# Altium PCB Type-It.PcbDoc
Units mil, origin at the board's own origin, x right, y up, seen from the top; angles counter-clockwise.
Board outline 4720 x 4085 mil, 2 copper layers (Top Layer, Bottom Layer); 20 components, 25 nets, 92 pads, 4 vias.
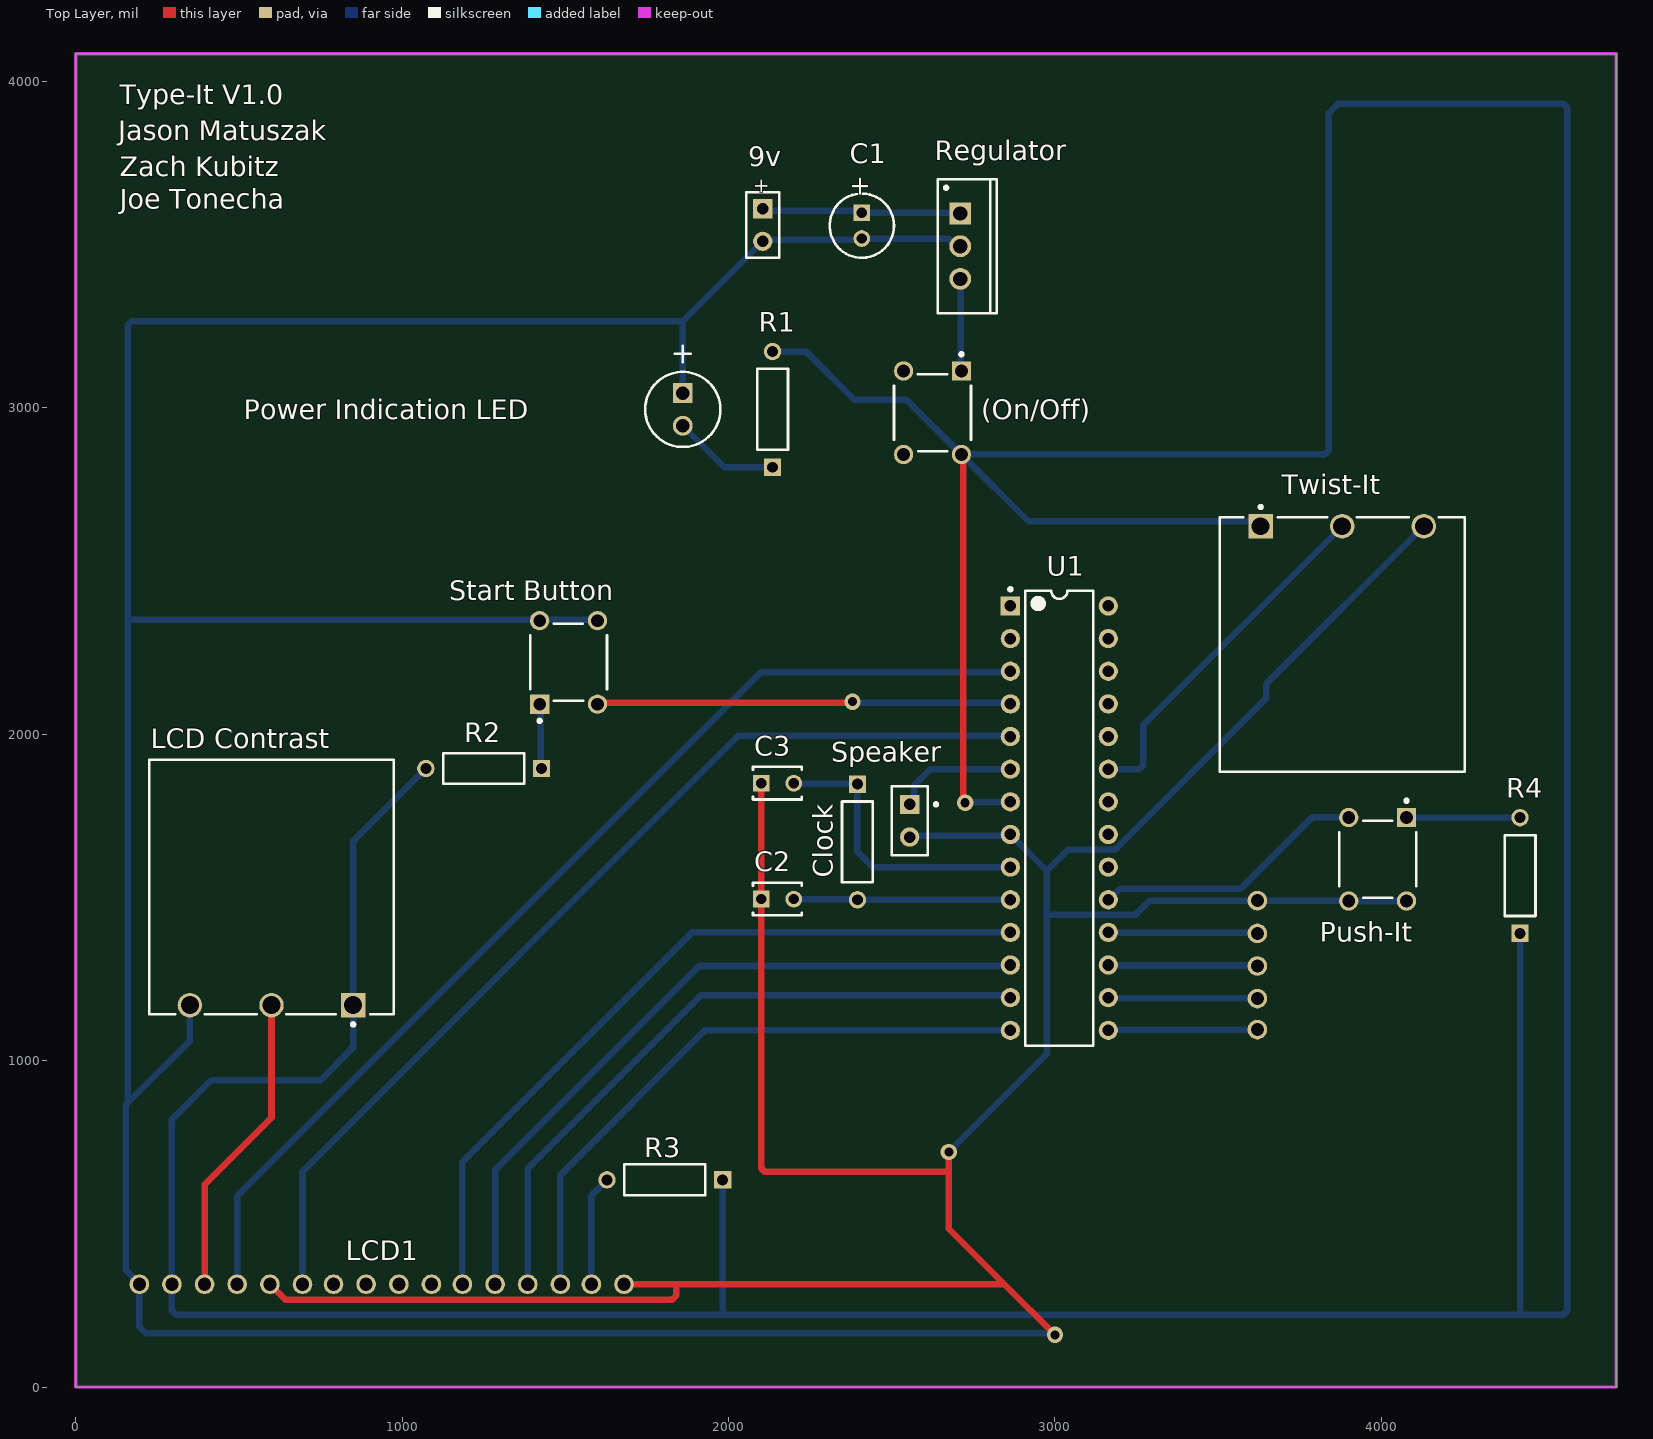
[diagram p0: Top Layer view]
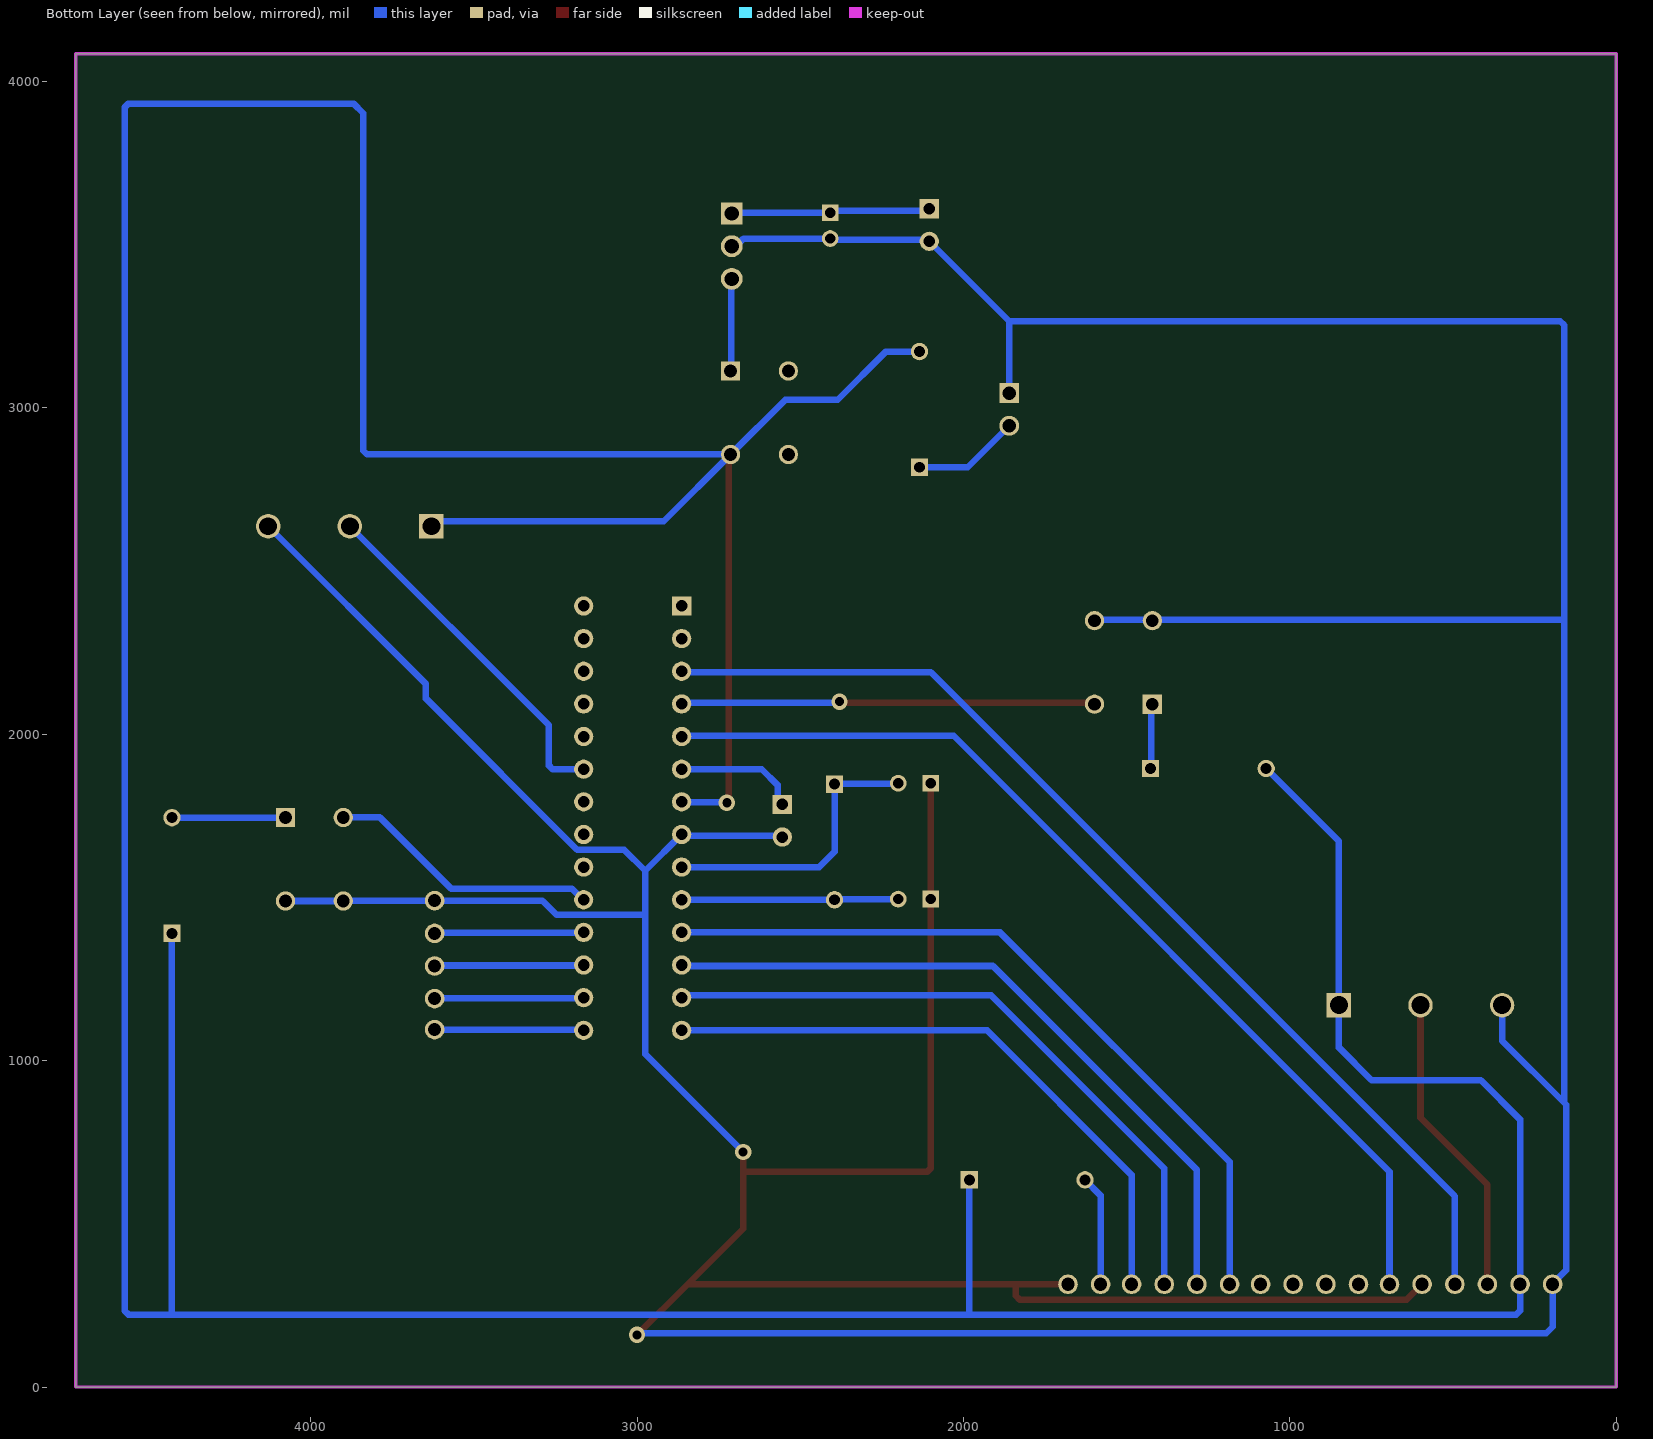
[diagram p1: Bottom Layer view, seen from below]

## Layer stack, top to bottom
Top Solder: solder mask 0.4, Solder Resist, Dk 3.5
Top Layer: signal copper 1.4
Dielectric 1: dielectric 12.6, FR-4, Dk 4.8
Bottom Layer: signal copper 1.4
Bottom Solder: solder mask 0.4, Solder Resist, Dk 3.5

## Board outline
0,0 4720,0 4720,4085 0,4085

## Design rules (kind name [scope] priority, off if disabled: settings)
BoardOutlineClearance [All] p1: gap=12 ignorepadtopadclearanceinfootprint=FALSE
Clearance [All] p1: gap=7 ignorepadtopadclearanceinfootprint=TRUE except(24: Arc-Via Track-Via SMDPad-Via THPad-Via Via-Via Via-Fill Via-Poly Via-Region Via-Text Via-Hole)
DiffPairsRouting [All] p1: maxlimit=10 minlimit=7 mostfreqgap=10 toplayer_minwidth=6 toplayer_maxwidth=15 toplayer_prefwidth=8 bottomlayer_minwidth=6 bottomlayer_maxwidth=15 bottomlayer_prefwidth=8 maxuncoupledlength=500
HoleToHoleClearance [All] p1: gap=17 allowstackedmicrovias=TRUE
PolygonConnect [All] p1: connectstyle=Relief reliefconductorwidth=10 reliefentries=4 polygonreliefangle="90 Angle" airgapwidth=10
RoomDefinition Type-It [InComponentClass('Type-It')] p1: confinementstyle=ConfineIn formatcopy=TRUE lockcomponents=FALSE outline 0,0 4720,0 4720,4085 0,4085
RoutingVias [All] p1: holewidth=30 width=35 viastyle="Through Hole" minholewidth=10 minwidth=11 maxholewidth=255 maxwidth=250
SilkToSilkClearance [All] p1: silktosilkclearance=0
SolderMaskExpansion SolderMaskExpansion_1 [All] p1: expansion=4 istentingtop=FALSE
Width [All] p1: maxlimit=10000 minlimit=7 preferedwidth=20 minimp=50.000000 maximp=50.000000 favimp=50.000000
27 further rules are at their usual default settings.

## Components (designator, comment, footprint, x,y, rotation, side; value= is the part's Value field where it differs from the comment)
9v "Battery" BAT-2 2105,3560 r270 top
(On/Off) "1825910-6" TECO-1825910-6_V 2625,2985 r270 top (schematic designator "DIP Switch (On/Off)")
C1 "10uF" CAPPR55-200-1100X500X1200 2408.58,3557.95 r270 top
C2 "22pF" KEMT-C315-THT-2 2150,1495 r0 top
C3 "22pF" KEMT-C315-THT-2 2150,1850 r0 top
Clock "" RESA60-630X240 2395,1670 r270 top
LCD1 "HD44780 1602 LCD Display Module" "test LCD footprint" 195,315 r0 top
"LCD Contrast" "Potentiometer" BOUR-3852A-282-103AL-3_V 600,1170 r180 top
"Power Indication LED" "HLMP-3301" AVAG-HLMP-3301-2 1860,3045 r270 top (schematic designator "Power Indicator LED")
Push-It "1825910-6" TECO-1825910-6_V 3988.58,1617.05 r270 top
R1 "220 Ohm" RESA60-630X240 2135,2995 r90 top
R2 "220 Ohm" RESA60-630X240 1250,1895 r180 top
R3 "220 Ohm" RESA60-630X240 1805,635 r180 top
R4 "220 Ohm" RESA60-630X240 4425,1567.17 r90 top
Regulator "L7805CV" TO220 2710,3495 r270 top (schematic designator Transformer)
Speaker "Speaker" PIN2 2555,1785 r270 top (schematic designator LoudSpeaker)
"Start Button" "1825910-6" TECO-1825910-6_V 1510,2220 r90 top
Twist-It "Potentiometer" BOUR-3852A-282-103AL-3_V 3880,2637.17 r0 top
U1 "ATmega328-PU" 28P3 3013.58,1742.95 r0 top
? "1x4 Keypad" "test keypad footprint" 3630,1490 r270 top

## Footprints (in the part's own frame and the unit in brackets; to place one, negate y for a bottom-side part, rotate by r counter-clockwise, add the part's x,y. Pads: shape width x height; smd on the part's side, far side on the other; paste and mask are expansions set on the pad)
28P3 [mm] "28-Pin Plastic Dual In-Line Package (PDIP)"
  rect 1.5x1.5 hole 0.9: 1(-3.81,16.51)
  round 1.5 hole 0.9: 2(-3.81,13.97) 3(-3.81,11.43) 4(-3.81,8.89) 5(-3.81,6.35) 6(-3.81,3.81) 7(-3.81,1.27) 8(-3.81,-1.27) 9(-3.81,-3.81) 10(-3.81,-6.35) 11(-3.81,-8.89) 12(-3.81,-11.43) 13(-3.81,-13.97) 14(-3.81,-16.51) 15(3.81,-16.51) 16(3.81,-13.97) 17(3.81,-11.43) 18(3.81,-8.89) 19(3.81,-6.35) 20(3.81,-3.81) 21(3.81,-1.27) 22(3.81,1.27) 23(3.81,3.81) 24(3.81,6.35) 25(3.81,8.89) 26(3.81,11.43) 27(3.81,13.97) 28(3.81,16.51)
  silkscreen extent -3.93,-17.7 2.65,17.93, body extent -3.6,-17.65 3.6,17.65, height 4.58
AVAG-HLMP-3301-2 [mm] "THD, 2-Leads, Body Dia 5.85mm"
  rect 1.55x1.55 hole 1.05: 1(0,0)
  round 1.55 hole 1.05: 2(2.54,0)
  silkscreen extent -3.68,-2.92 4.19,2.92
BAT-2 [mm] "Battery; 2 Leads"
  rect 1.5x1.5 hole 0.9: 1(-1.27,0)
  round 1.5 hole 0.9: 2(1.27,0)
  silkscreen extent -2.54,-1.27 2.54,1.27
BOUR-3852A-282-103AL-3_V [mm] "TH, 3-Leads, Body 19.81x19.05mm, Pitch 6.35mm"
  rect 1.9x1.9 hole 1.4: 1(-6.35,0)
  round 1.9 hole 1.4: 2(0,0) 3(6.35,0)
  silkscreen extent -9.53,-19.11 9.53,1.62, body extent -9.52,-19.11 9.52,0.7, height 19.05
CAPPR55-200-1100X500X1200 [mm] "THD, 2-Leads, Dia 5mm, Body Length 11mm"
  rect 1.3x1.3 hole 0.8: 1(-1,0)
  round 1.3 hole 0.8: 2(1,0)
  silkscreen extent -2.5,-2.5 2.5,2.5, body extent -2.5,-2.5 2.5,2.5, height 12
KEMT-C315-THT-2 [mm] "THD, 2-Leads, Body 3.81x2.54mm"
  rect 1.3x1.3 hole 0.8: 1(-1.27,0)
  round 1.3 hole 0.8: 2(1.27,0)
  silkscreen extent -1.91,-1.27 1.91,1.27, body extent -1.91,-1.27 1.91,1.27, height 4.66
PIN2 [mm] "Photosensitive Diode; 2 Leads"
  rect 1.5x1.5 hole 0.9: 1(0,0)
  round 1.5 hole 0.9: 2(2.54,0)
  silkscreen extent -1.4,-1.4 3.94,2.18
RESA60-630X240 [mm] "Axial Resistor, 2-Leads, Dia 2.4mm, Body Length 6.3mm"
  rect 1.35x1.35 hole 0.85: 1(-4.5,0)
  round 1.35 hole 0.85: 2(4.5,0)
  silkscreen extent -3.15,-1.2 3.15,1.2, body extent -3.15,-1.2 3.15,1.2, height 2.4
TECO-1825910-6_V [mm] "Switch, 4-Leads, Body 5.99x5.99mm"
  rect 1.5x1.5 hole 0.99: 1(-3.25,2.25)
  round 1.5 hole 0.99: 2(3.25,2.25) 3(-3.25,-2.25) 4(3.25,-2.25)
  silkscreen extent -4.67,-2.99 2.99,3, body extent -3,-2.99 2.99,3, height 5
"test keypad footprint" [mil]
  round 60 hole 40: 1(0,-10) 2(100,-10) 3(200,-10) 4(300,-10) 5(395,-10)
"test LCD footprint" [mil]
  round 60 hole 40: 1(0,0) 2(100,0) 3(200,0) 4(300,0) 5(400,0) 6(500,0) 7(595,0) 8(695,0) 9(795,0) 10(895,0) 11(990,0) 12(1090,0) 13(1190,0) 14(1290,0) 15(1385,0) 16(1485,0)
TO220 [mm] "TO, Thru-Hole, Vertical, Heatsink Mounted; 3 In-Line Leads; Pitch 2.54 mm"
  rect 1.7x1.7 hole 1.1: 1(-2.54,0)
  round 1.7 hole 1.1: 2(0,0) 3(2.54,0)
  silkscreen extent -5.2,-1.75 5.2,2.85, body extent -5.25,-1.8 5.25,2.9, height 19.7

## Part data
9v: "Multicell Battery", LatestRevisionDate=17-Jul-2002, LatestRevisionNote="Re-released for DXP Platform.", PackageDescription="Battery; 2 Leads", PackageReference=BAT-2, Published=24-Mar-1999, Publisher="Altium Limited"
(On/Off) Push-It "Start Button": library part CMP-1684-00021-1, "Tact Switch, SPST-NO, 0.05 A, -35 to 85 degC, 4-Pin THD, RoHS, Bulk", Actuator Color=Black, Contact Rating @ Voltage=0.05A@24VDC, Dielectric Strength=500VAC, Manufacturer="TE Connectivity", Maximum AC Voltage Rating=N/A, Maximum Contact Resistance=100mOhm, Maximum DC Voltage Rating=24V, Minimum Insulation Resistance=100MOhm, Operating Temperature=-35to85C, Package Description="4-Pin Through Hole Device, Body 5.99 x 5.99 mm, Pitch 6.5 mm", Package Reference=THD, Actuator Length=1.4mm, Actuator Material=PolybutyleneTerephthalate, Actuator Style=RoundButton, Base Material=N/A, Body Orientation=Straight, Bushing Type=Unthreaded, Contact Material=CopperAlloy, Contact Plating=Silver, Datasheet URL=http://www.te.com/commerce/DocumentDelivery/DDEController?Action=showdoc&DocId=Customer+Drawing%7F1825910%7FC9%7Fpdf%7FEnglish%7FENG_CD_1825910_C9.pdf%7F1825910-6, Datasheet Version="Rev. C9", Dimension=5.99x5mm, Electrical Life=100000Cycles, Family=1825910, Function=MomentaryContact, Housing Material=N/A, Illumination=N/R, Manufacturer URL=http://www.te.com, Mechanical Life=100000Cycles, Mounting=ThroughHole, Packaging=N/A, Part No=1825910-6, Pole Throw Configuration=SPST, Product Weight=N/A, RoHS=Yes, Seal Description=N/A, Seal Location=N/A, Switch Configuration=OFF(ON), Terminal Type=PCPins, Thread Size=N/R
C1: library part CMP-2100-03622-1, "Aluminum Electrolytic Capacitor, 10 uF, +/- 20%, 50 V, -40 to 85 degC, 2-Pin THD, RoHS, Bulk", Case/Package=Radial, Dielectric Material=Aluminium, Leakage Current=3uA, Manufacturer=Panasonic, Max Operating Temperature=85degC, Min Operating Temperature=-40degC, Package Description="2-Pin Radial Lead, Dia 5 mm, Height 12 mm", Package Quantity=200, Package Reference=CAPPR55-200-1100X500X1200, Ripple Current=65mA, Tolerance=20%, Voltage=50V, Capacitance=10uF, Datasheet URL=https://industrial.panasonic.com/cdbs/www-data/pdf/RDF0000/ABA0000C1218.pdf, Datasheet Version="Rev. 05, 10/2016", Diameter=5mm, Dissipation Factor=0.12%, Height=11mm, Height - Seated (Max)=0.472inch, Lead Diameter=0.5mm, Lead Free=LeadFree, Lead Pitch=2mm, Lead/Base Style=Straight, Length=11mm, Life (Hours)=2000Hour, Manufacturer URL=http://www.panasonic.com/, Mount=ThroughHole, Number of Pins=2, Packaging=Bulk, Radiation Hardening=No, REACH SVHC=NoSVHC, Ripple Current (AC)=65mA, RoHSCompliant=true, Termination=Radial, Voltage Rating=50V, Voltage Rating (DC)=50V
C2 C3: library part CMP-1664-00008-1, "Capacitor, Ceramic, 22 pF, +/-10 %, 100 V, -55 to 125 degC, 2-Pin THD, RoHS, Bulk", Case\Package=TO-220, Max Input Voltage="40 V", Max Operating Temperature="125 degC", Max Ouput Current="1.5 A", Min Input Voltage="4.2 V", Min Operating Temperature="0 degC", Output Voltage="1.2 V", Package Quantity=50, ComponentLink1Description="Manufacturer URL", ComponentLink1URL=http://www.kemet.com/, ComponentLink2Description=Datasheet, ComponentLink2URL=http://capacitoredge.kemet.com/capedge2/DataSheet/Datasheet-C315C220K1G5TA.pdf?pn=C315C220K1G5TA{BULK}, DatasheetVersion=Aug-16, Height="9.28 mm", Length="10.28 mm", Mount="Through Hole", Output Current="1.5 A", Outputs=1, PackageDescription="2-Pin Through Hole Device, Body 3.81 x 2.54 mm", PackageReference=C315-THT-2, Packaging=Rail/Tube, Pins=3, Radiation Hardening=No, REACH SVHC="No SVHC", RoHSCompliant=true, Weight="0.08113 oz", Width="4.82 mm"
Clock R1 R2 R3 R4: library part CMP-1659-00063-1, "Axial Resistor, 47.5 KOhm, +/- 1%, 0.25 W, -55 to 155 degC, 2-Pin THD, RoHS, Bulk", Case Code (Metric)=2520, Case\Package=1008, Current Rating="1.3 A", Max Operating Temperature="125 degC", Min Operating Temperature="-55 degC", Package Quantity=3000, Tolerance=20%, ComponentLink1Description="Manufacturer URL", ComponentLink1URL=http://www.yageo.com/, ComponentLink2Description=Datasheet, ComponentLink2URL=http://www.yageo.com/documents/recent/Yageo%20LR_MFR_2013.pdf, DatasheetVersion=Apr-13, Height="1.2 mm", Length="2.5 mm", Mount="Surface Mount", PackageDescription="2-Pin Axial Lead, Dia 2.4 mm, Body Length 6.3 mm", PackageReference=MFR-25, Packaging="Tape and Reel", Radiation Hardening=No, RoHSCompliant=true, Shielding=Shielded, Width="2 mm"
LCD1: library part "16x2 LCD Display", "1602 standard 16-pin interface, including: / Pin 1: VSS is the ground power. / 2 feet: VDD then 5V positive power supply. / 3 feet: V0 LCD contrast adjustment end, then the positive power supply when the contrast is the weakest, the highest contrast when grounded power, the contrast is too high will have a \"ghosting\", when used by a 10K potentiometer to adjust the contrast. / 4 feet: RS for the register selection, high-level data register selection, low-level instruction register selection. / 5 feet: R / W for the read and write signal lines, high-level read operation, low-level write operation. / 6th foot: E end is enable end, when E end jumps from high level to low level, the liquid crystal module carries out the order. / 7 ~ 14 feet: D0 ~ D7 for the 8-bit bidirectional data lines. / 15 feet: the positive power supply backlight / 16th foot: backlight power negative"
"LCD Contrast" Twist-It: library part CMP-2000-05079-1, "Diameter Panel Control, 10 KOhm, +/- 10%, 2 W, -1 to 125 degC, 3-Pin THD, RoHS, Bulk", Manufacturer=Bourns, Power (Watts)=2W, Resistance (Ohms)=10k, Resistive Material=Cermet, Standard Package=45, Temperature Coefficient=±150ppm/degC, Tolerance=±10%, Actuator Diameter="0.250\"(6.35mm)", Actuator Length="0.875\"(22.23mm)", Actuator Type=Slotted, Associated Product="36-8560-ND / -KNOBINSTRUMW/DIALRND.9\"DIA / 36-8555-ND / -KNOBINSTRUMSKIRTEDRND.7\"DIA / 36-8556-ND / -KNOBINSTRUMSKIRTEDRND.9\"DIA / 36-8565-ND / -KNOBINSTRUMDBLBARRND.7\"DIA / 36-8566-ND / -KNOBINSTRUMDBLBARRND.9\"DIA / 36-8568-ND / -KNOBINSTRUMSGLBARRND.7\"DIA / 36-8569-ND / -KNOBINSTRUMSGLBARRND.9\"DIA / 36-8559-ND / -KNOBINSTRUMW/DIALRND.7\"DIA / 226-1006-ND / -KNOBBLKGLOSS.75\"DIA.250\"SHAFT / 226-1007-ND / -KNOBBLKGLOSS.925\"DIA.250\"SHAFT / 226-1011-ND / -KNOBBLKGLOS", Built in Switch=None, Bushing Thread=3/8-32, Catalog Drawings="3852SeriesSide1 /  / 3852SeriesSide2", Category=Potentiometers,VariableResistors, Datasheet URL=https://datasheet.ciiva.com/11831/0900766b80f93b4b-11831016.pdf, Datasheet Version=Sep-14, Family=RotaryPotentiometers,Rheostats, Manufacturer URL=http://www.bourns.com/, Mounting Type=PanelMount, Number of Gangs=1, Number of Turns=1, Online Catalog=3852and3856Series, Other Names=3852A282103AL, Packaging=Bulk, PCN Design/Specification=PBTResinJun/2011, PCN Other=MultipleChanges01/Dec/2012, RoHS Information=3852A-LMaterialDeclaration, Rotation=280deg, Series=3852, Taper=Linear, Termination Style=SolderLug
"Power Indication LED": library part CMP-2000-06411-1, "T-1 3/4 (5 mm) Diffused LED Lamp, 1.9 V, -40 to 100 degC, 2-Pin THD, RoHS, Bulk", Emitting Color=Red, Forward Current=25mA, Forward Voltage=2.4V, Manufacturer=Avago, Operating Temp Range=-40Cto100C, Operating Temperature Classification=Industrial, Package Description="2-Pin Through Hole LED, Dia 5.85 mm", Package Type=T-13/4, Power Dissipation=85W, Reverse Voltage=5V, Test Current (It)=10mA, Chip Material=GaP, Datasheet URL=http://www.avagotech.com/docs/AV02-1558EN, Datasheet Version=03/2015, DELETED=Compliant, Dominant Wave Length=626nm, High Brightness=No, Lens Dimensions=5.08x5.08x8.3mm, Lens Type=ColoredDiffused, Lum Intensity=5.4mcd, Luminous Intensity=5.4mcd, Main Category=StandardLED, Manufacturer URL=http://www.avagotech.com/, Mounting=ThroughHole, Mounting Technology=ThroughHole, Number of  Elements=1, Package Reference=HLMP-3301, Packaging=TapeandReel, Peak Wavelength=635nm, Pin Count=2, Product Depth (mm)=6.1mm, Product Height (mm)=9.19mm, Product Length (mm)=6.1mm, Rad Hardened=No, Shape Type=Circular, Type=Uni-Color, Viewing Angle=60deg
Regulator: library part CMP-0244-00483-1, "Positive Voltage Regulator, 5V, 3-Pin TO-220", ComponentLink1Description="Manufacturer URL", ComponentLink1URL=http://www.st.com, ComponentLink2Description=Datasheet, ComponentLink2URL=http://www.st.com/internet/com/TECHNICAL_RESOURCES/TECHNICAL_LITERATURE/DATASHEET/CD00000444.pdf, ComponentLink3Description="Package Specification", ComponentLink3URL=http://www.st.com/internet/com/TECHNICAL_RESOURCES/TECHNICAL_LITERATURE/PACKAGE_INFORMATION/CD00004649.pdf, DatasheetVersion=16/11/2011, PackageDescription="TO, Thru-Hole, Vertical, Heatsink Mounted; 3 In-Line Leads; Pitch 2.54 mm", PackageReference=TO220, PackageVersion=ver3.0
Speaker: "Loudspeaker", LatestRevisionDate=17-Jul-2002, LatestRevisionNote="Re-released for DXP Platform.", PackageReference=PIN2, Published=24-Mar-1999, Publisher="Altium Limited"
U1: library part CMP-0095-00015-2, "8-bit AVR Microcontroller, 32KB Flash, 1KB EEPROM, 2KB SRAM, 28-pin PDIP, Industrial Grade (-40°C to 85°C)", ComponentLink1Description="Manufacturer URL", ComponentLink1URL=http://www.atmel.com/, ComponentLink2Description="ATmega48A/48PA/88A/88PA/168A/168PA/328/328P Datasheet", ComponentLink2URL=http://www.atmel.com/dyn/resources/prod_documents/8271.pdf, ComponentLink3Description="ATmega48A/48PA/88A/88PA/168A/168PA/328/328P Summary", ComponentLink3URL=http://www.atmel.com/dyn/resources/prod_documents/8271S.pdf, DatasheetVersion="revD, May-2011", PackageDescription="28-lead (0.300\"/7.62mm Wide) Plastic Dual Inline Package (PDIP)", PackageReference=28P3, PackageVersion="revB, Sep-2001", RevisionNote="DatasheetVersion updated. URLs added."

## Via types
v1: diameter 50, hole 28, Top Layer to Bottom Layer, 4 vias

## Nets (pads, with @x,y where several pads share a name; then routed paths per layer and width w, separated by ;. In a path a pad name is that pad's centre, name@x,y a point inside that pad or via, vN(x,y) a via of type N, cw(c..) or ccw(c..) an arc to the next point about the centre after c; other vN are vias at no path point)
Net9v_1: 9v.1 C1.1 Regulator.1 | length 611.2
  Bottom Layer w20: 9v.1 2111.34,3603.66 2402.24,3603.66 C1.1 2707.68,3597.32 Regulator.1
Net9v_2: 9v.2 "LCD Contrast.3" "Power Indication LED.1" "Start Button.2" "Start Button.4" ?.1 C1.2 C2.1 C3.1 LCD1.1 LCD1.5 LCD1.16 Push-It.2 Push-It.4 Regulator.2 Speaker.2 Twist-It.3 U1.8 | length 19741.3
  Top Layer w20: LCD1.5 642,268 1828.28,268 1840,279.72 1840,315 ; LCD1.16 1840,315 ; C3.1 C2.1 2100,670.87 2111.72,659.15 2675,659.15 ; Speaker.2 Speaker.2@2560,1690 ; v1(2675,720) 2675,659.15 ; v1(3000,160) 2845,315 ; 1840,315 2845,315 ; 2675,659.15 2675,485 2845,315
  Bottom Layer w20: 350,1170 350,1060.96 160,870.96 ; 1421.42,2347.95 1419.37,2350 ; 1598.58,2347.95 1596.54,2350 1419.37,2350 ; 1860,3045 1860,3265 ; Speaker.2 2558.98,1688.98 2859.61,1688.98 U1.8 2975,1581.54 ; v1(2675,720) 2975,1020 2975,1455 ; Regulator.2 2697.3,3495 2673.72,3518.58 C1.2 2404.29,3514.29 2109.29,3514.29 9v.2 1860,3265 ; v1(3000,160) 2995,165 215,165 195,185 LCD1.1 195,317.02 153.58,358.44 153.58,864.55 160,870.96 ; Push-It.2 Push-It.4 3899.55,1489.55 3620.45,1489.55 ?.1 3290,1490 3246.43,1446.43 2983.57,1446.43 2975,1455 ; Twist-It.3 3646.75,2153.92 3646.75,2109.15 3184.02,1646.43 3039.89,1646.43 2975,1581.54 ; 160,870.96 160,2350 ; 160,2350 1419.37,2350 ; 160,2350 160,3253.28 171.72,3265 1860,3265 ; 2975,1455 2975,1581.54
"Net  _1": "Start Button.1" R2.1 | length 199.4
  Bottom Layer w20: 1421.42,2092.05 1424.29,2089.17 1424.29,1897.87 R2.1
"Net  _3": "Start Button.3" U1.4 | length 1271.2
  Top Layer w20: 1598.58,2092.05 1602.56,2096.02 2376.02,2096.02 v1(2380,2100)
  Bottom Layer w20: v1(2380,2100) 2383.52,2096.48 2860.06,2096.48 U1.4
Net_2: ?.2 U1.18 | length 457.6
  Bottom Layer w20: U1.18 3165.06,1391.48 3618.52,1391.48 ?.2
Net_3: ?.3 U1.17 | length 457.6
  Bottom Layer w20: U1.17 3165.06,1291.48 3618.52,1291.48 ?.3
Net_4: ?.4 U1.16 | length 457.6
  Bottom Layer w20: U1.16 3165.06,1191.48 3618.52,1191.48 ?.4
Net_5: ?.5 U1.15 | length 457.3
  Bottom Layer w20: U1.15 3164.61,1093.98 3618.98,1093.98 ?.5
NetC2_2: C2.2 Clock.2 U1.10 | length 664.5
  Bottom Layer w20: C2.2 2201.08,1493.92 2393.92,1493.92 Clock.2 2395.06,1492.89 2863.52,1492.89 U1.10
NetC3_2: C3.2 Clock.1 U1.9 | length 894.3
  Bottom Layer w20: C3.2 2201.42,1848.58 2393.58,1848.58 Clock.1 2395,1640 2442.05,1592.95 U1.9 U1.9@2861.54,1595
"NetDIP Switch (On/Off)_1": (On/Off).1 Regulator.3 | length 283.5
  Bottom Layer w20: Regulator.3 2711.79,3393.21 2711.79,3114.74 2713.58,3112.95
"NetDIP Switch (On/Off)_2": "LCD Contrast.1" (On/Off).2 LCD1.2 R1.2 R2.2 R3.1 R4.1 Twist-It.1 U1.7 | length 17574.8
  Top Layer w20: 2713.58,2857.05 2719.29,2851.34 2719.29,1795.71 v1(2725,1790)
  Bottom Layer w20: R2.2 850,1672.17 850,1170 850,1040 750,940 415,940 295,820 LCD1.2 295,233.76 306.72,222.05 1980,222.05 ; R3.1 1982.17,224.21 1980,222.05 ; R1.2 2237.83,3172.17 2385,3025 2545.63,3025 2713.58,2857.05 ; v1(2725,1790) 2726.48,1791.48 2862.11,1791.48 U1.7 ; Twist-It.1 3615,2652.17 2918.46,2652.17 2713.58,2857.05 ; R4.1 4425,227.05 4420,222.05 ; 1980,222.05 4420,222.05 ; 2713.58,2857.05 3826.87,2857.05 3838.58,2868.76 3838.58,3902.05 3868.58,3932.05 4558.28,3932.05 4570,3920.33 4570,233.76 4558.28,222.05 4420,222.05
NetLCD1_3: "LCD Contrast.2" LCD1.3 | length 939.9
  Top Layer w20: LCD1.3 395,620 600,825 600,1170
NetLCD1_4: LCD1.4 U1.3 | length 3304.6
  Bottom Layer w20: LCD1.4 495,585 2100,2190 2860.63,2190 U1.3
NetLCD1_6: LCD1.6 U1.5 | length 3067.4
  Bottom Layer w20: LCD1.6 695,660 2030,1995 2861.54,1995 U1.5
NetLCD1_11: LCD1.11 U1.11 | length 2344.8
  Bottom Layer w20: LCD1.11 1185,690 1887.95,1392.95 U1.11
NetLCD1_12: LCD1.12 U1.12 | length 2188.7
  Bottom Layer w20: LCD1.12 1285,665 1910,1290 2860.63,1290 U1.12
NetLCD1_13: LCD1.13 U1.13 | length 2056
  Bottom Layer w20: LCD1.13 1385,670 1915,1200 2856.54,1200 U1.13
NetLCD1_14: LCD1.14 U1.14 | length 1897.1
  Bottom Layer w20: LCD1.14 1485,650 1927.95,1092.95 U1.14
NetLCD1_15: LCD1.15 R3.2 | length 339.8
  Bottom Layer w20: LCD1.15 1580,587.17 R3.2
NetLoudSpeaker_1: Speaker.1 U1.6 | length 379.7
  Bottom Layer w20: Speaker.1 2569.53,1799.53 2569.53,1844.53 2617.95,1892.95 U1.6
"NetPower Indicator LED_2": "Power Indication LED.2" R1.1 | length 327.7
  Bottom Layer w20: 1860,2945 1987.17,2817.83 R1.1
NetPush-It_1: Push-It.1 R4.2 | length 348.1
  Bottom Layer w20: Push-It.1 4077.5,1744.67 4424.67,1744.67 R4.2
NetPush-It_3: Push-It.3 U1.19 | length 840.8
  Bottom Layer w20: U1.19 3165.79,1492.95 3200,1527.17 3570,1527.17 3787.83,1745 Push-It.3
NetTwist-It_2: Twist-It.2 U1.23 | length 1097.6
  Bottom Layer w20: U1.23 3164.37,1892.17 3258.28,1892.17 3270,1903.88 3270,2027.17 Twist-It.2
pads on no net: (On/Off).3 (On/Off).4 LCD1.7 LCD1.8 LCD1.9 LCD1.10 U1.1 U1.2 U1.20 U1.21 U1.22 U1.24 U1.25 U1.26 U1.27 U1.28

## Keep-outs
Keep-Out Layer:
  the board outline again, w10

## Silkscreen, mask and mechanical layers (free items; w line width, h text height)
Top Overlay:
  text "Type-It V1.0" at 135,3929.99 h60
  text "Jason Matuszak" at 130,3820 h60
  text "Zach Kubitz" at 135,3710 h60
  text "Joe Tonecha" at 135,3610 h60

## Text inside footprints (layer, text, board x,y; h text height)
9v: Top Overlay "+" at 2082.28,3704.49 h45.28 r270
C1: Top Overlay "+" at 2379.57,3711.81 h59.06 r270